# Altium PCB PwrSup.PcbDoc
Units mm, origin at the board's own origin, x right, y up, seen from the top; angles counter-clockwise.
Board outline 68.7 x 54.4 mm, 2 copper layers (Top Layer, Bottom Layer); 11 components, 47 nets, 32 pads, 0 vias.
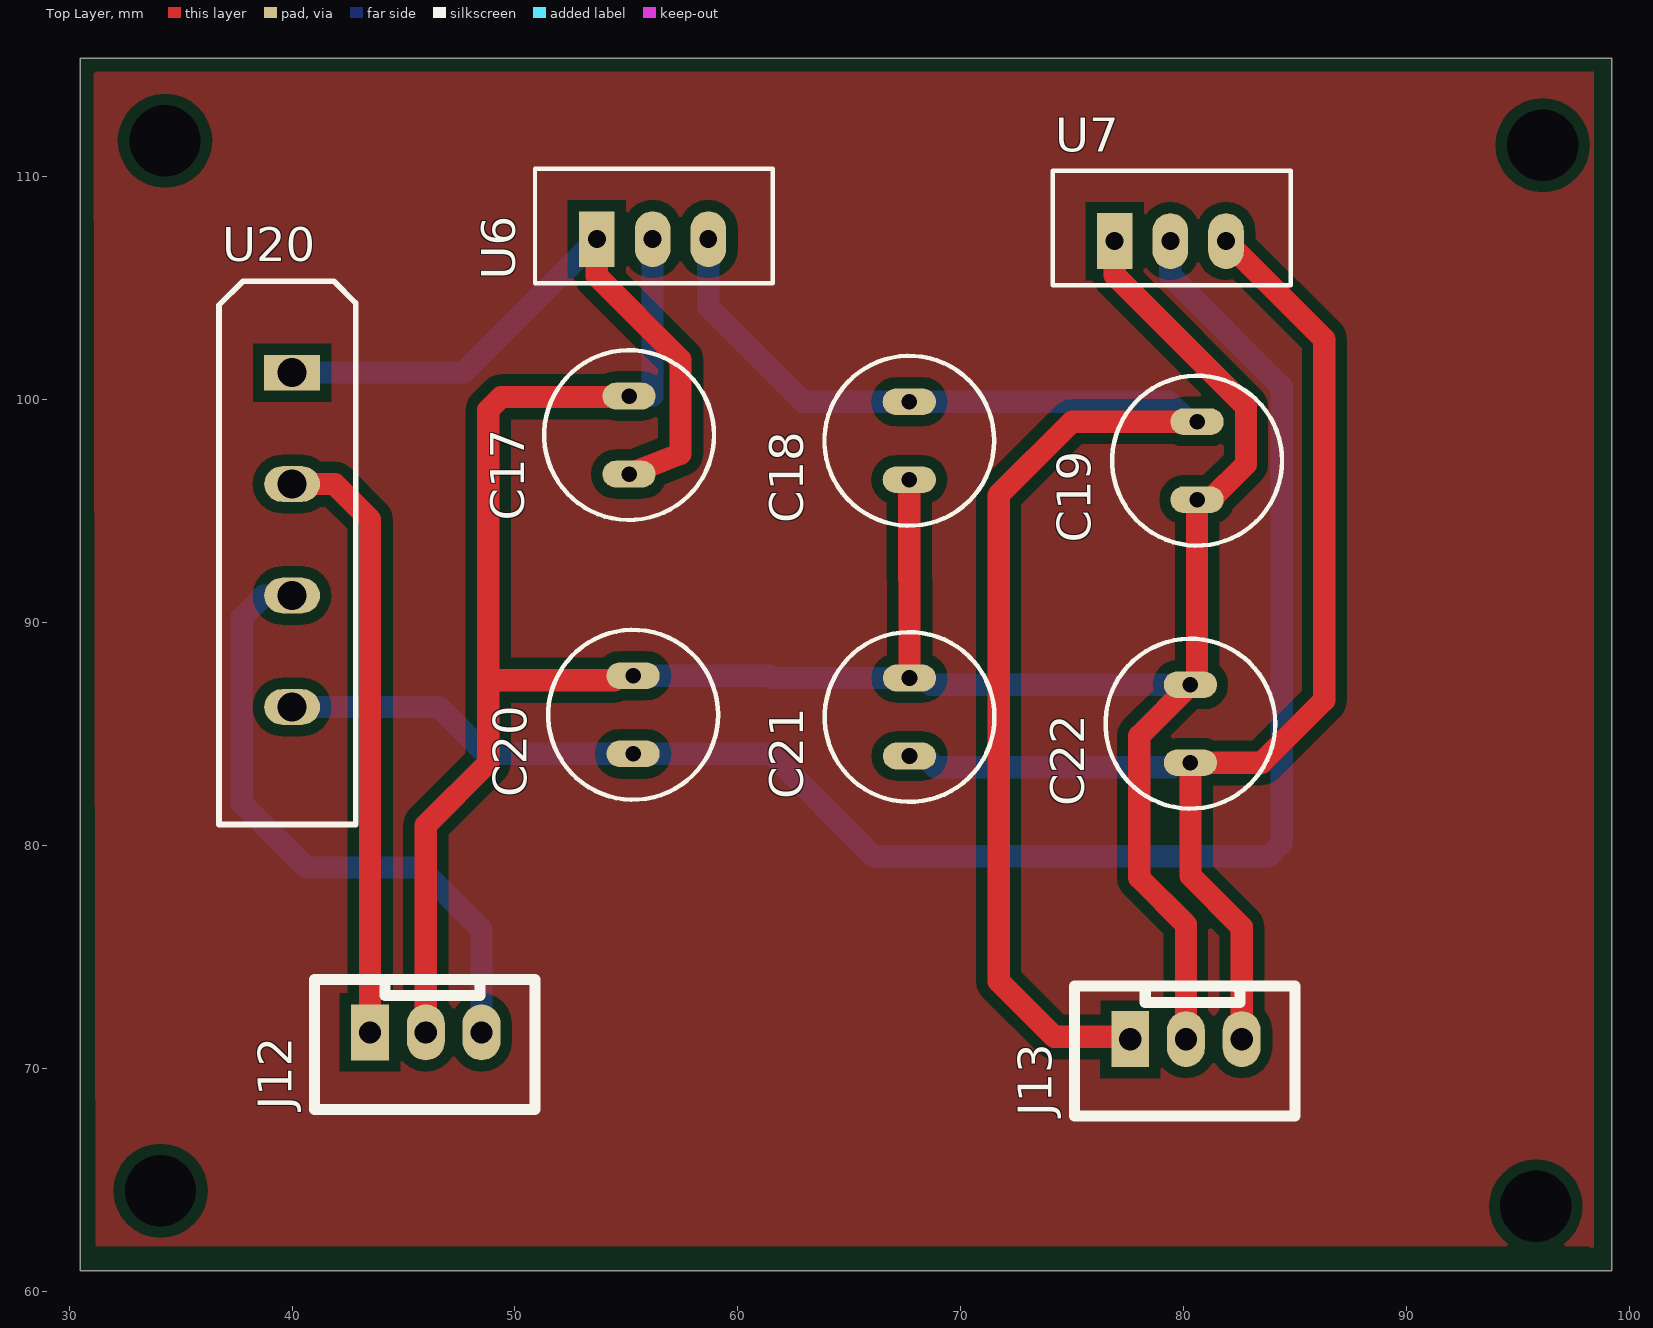
[diagram p0: Top Layer view]
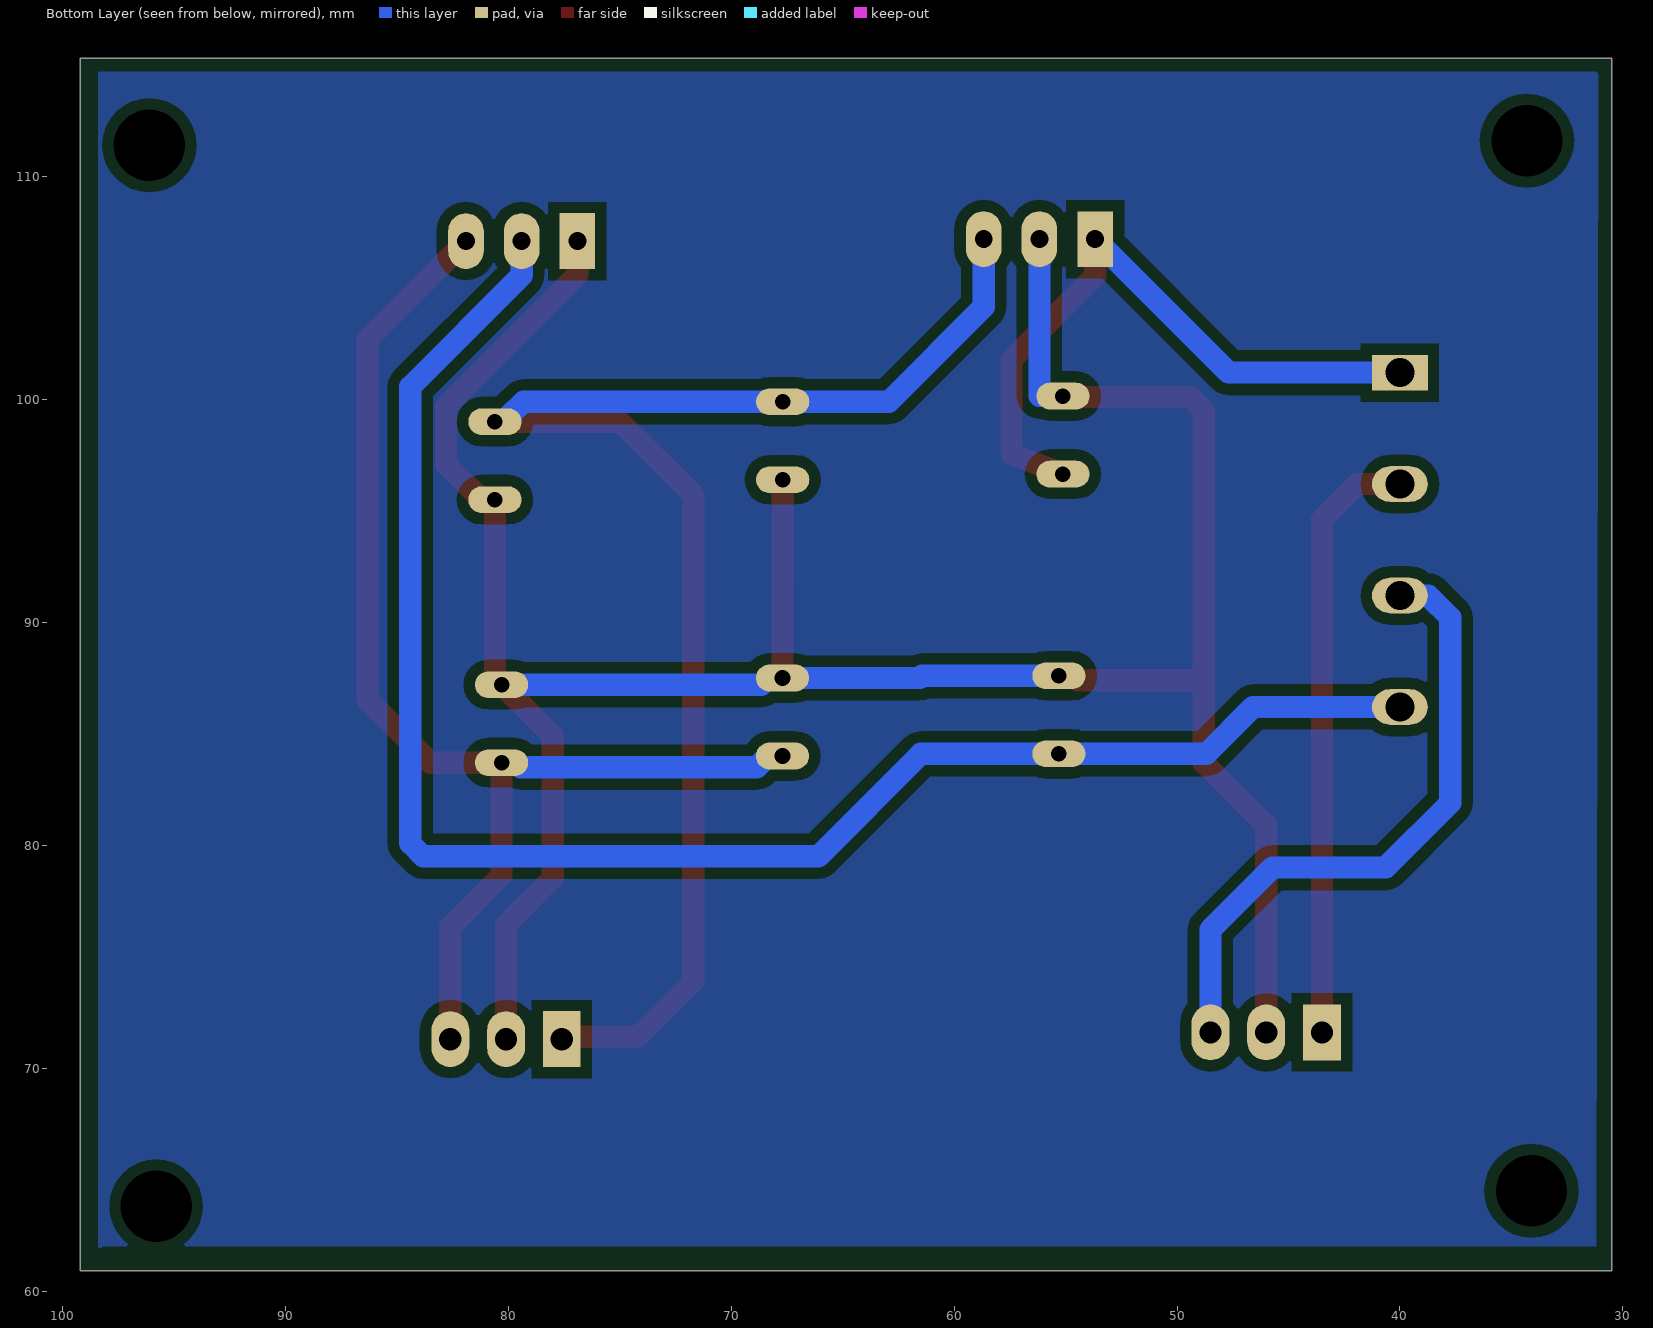
[diagram p1: Bottom Layer view, seen from below]
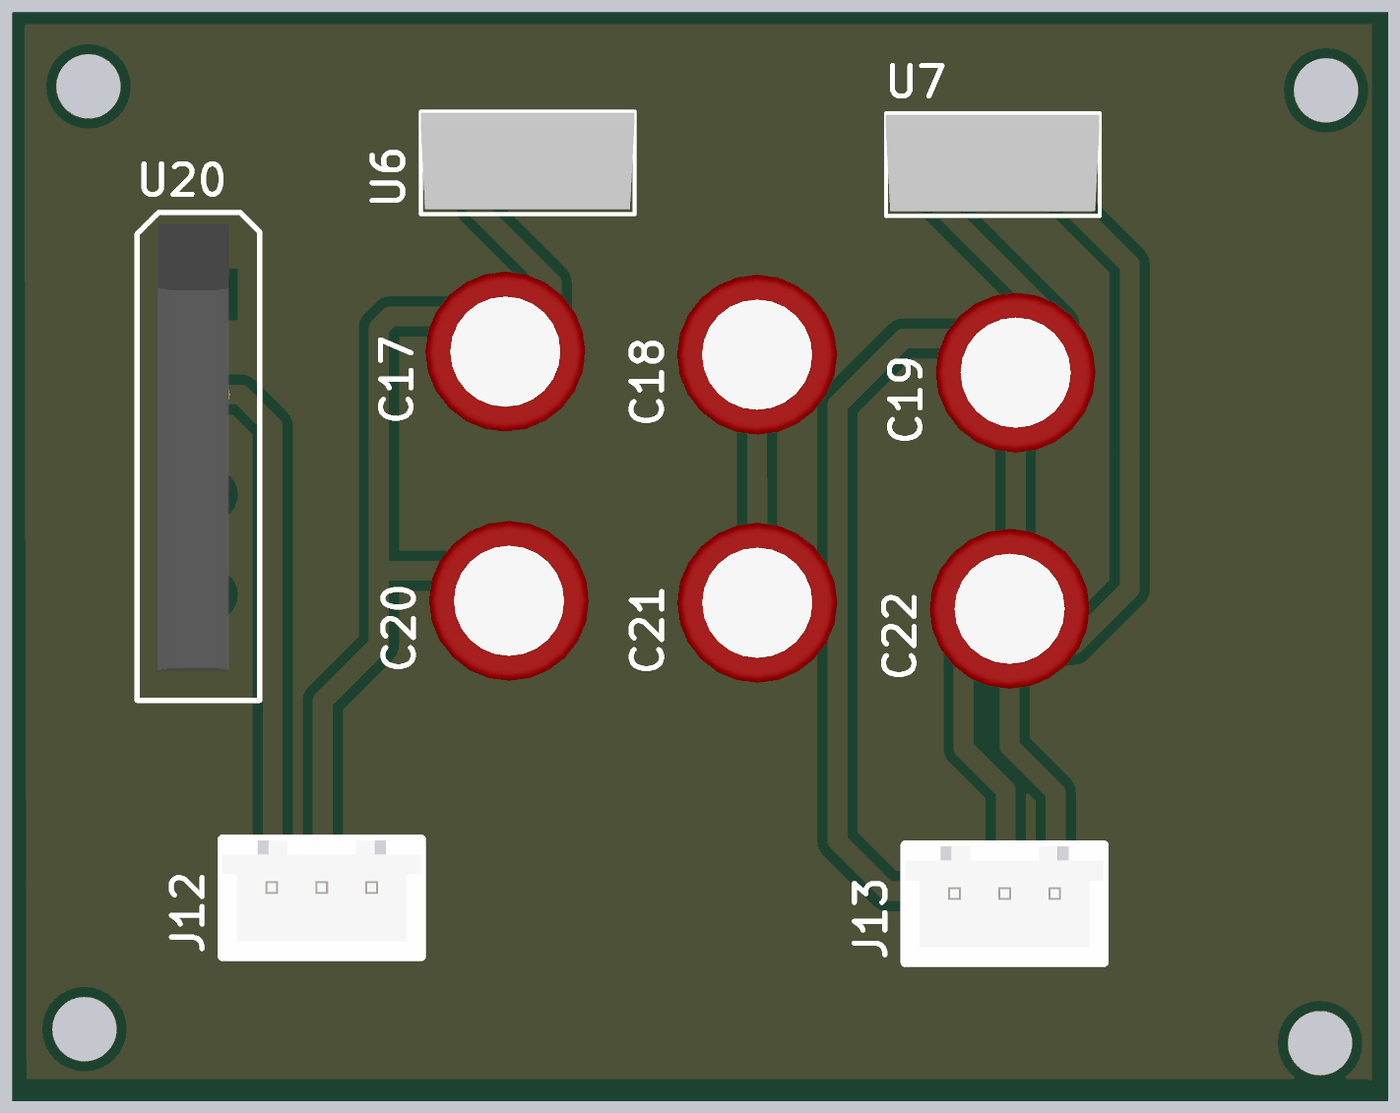
[diagram p2: 3D render of the assembled board from above, using the file's embedded part models]

## Layer stack, top to bottom
Top Solder: solder mask 0.0102, Solder Resist, Dk 3.5
Top Layer: signal copper 0.0356
Dielectric 1: dielectric 0.32, FR-4, Dk 4.8
Bottom Layer: signal copper 0.0356
Bottom Solder: solder mask 0.0102, Solder Resist, Dk 3.5

## Board outline
30.5,60.9 30.5,115.3 99.2,115.3 99.2,60.9

## Design rules (kind name [scope] priority, off if disabled: settings)
Clearance [All] p1: gap=0.5 ignorepadtopadclearanceinfootprint=FALSE
PolygonConnect [All] p1: connectstyle=Relief reliefconductorwidth=0.254 reliefentries=4 polygonreliefangle="90 Angle" airgapwidth=0.254
RoutingVias [All] p1: holewidth=0.711 width=1.27 viastyle="Through Hole" minholewidth=0.711 minwidth=1.27 maxholewidth=0.711 maxwidth=1.27
SolderMaskExpansion [All] p1: expansion=0.102 istentingtop=FALSE
Width Width_1 [All] p1: maxlimit=1 minlimit=1 preferedwidth=1
Width [All] p2: maxlimit=1 minlimit=1 preferedwidth=1
30 further rules are at their usual default settings.

## Components (designator, comment, footprint, x,y, rotation, side; value= is the part's Value field where it differs from the comment)
C17 "Cap_NP" "CAP NP" 55.118,100.147 r270 top value=2200uF
C18 "Cap_NP" "CAP NP" 67.691,96.393 r90 top value=100nF
C19 "Cap_NP" "CAP NP" 80.6,95.5 r90 top value=10uF
C20 "Cap_NP" "CAP NP" 55.3,84.1 r90 top value=2200uF
C21 "Cap_NP" "CAP NP" 67.7,84 r90 top value=10uF
C22 "Cap_NP" "CAP NP" 80.3,83.7 r90 top value=100nF
J12 "Jst" JST_3P 43.5,71.6 r90 top
J13 "Jst" JST_3P 77.6,71.3 r90 top
U6 "LM7812" "TIP 31" 53.674,107.188 r90 top
U7 "LM7912" "TIP 31" 76.9,107.1 r90 top
U20 "Diode_Bridge" "Diode Bridge 2" 40,101.2 r0 top

## Footprints (in the part's own frame and the unit in brackets; to place one, negate y for a bottom-side part, rotate by r counter-clockwise, add the part's x,y. Pads: shape width x height; smd on the part's side, far side on the other; paste and mask are expansions set on the pad)
"CAP NP" [mm]
  oval 1.2x2.388 hole 0.7: 1(0,0) 2(3.5,0)
  silkscreen extent -2.06,-3.81 5.56,3.81, body extent -2.2,-4 5.8,4, height 12
"Diode Bridge 2" [mm]
  rect 2.5x1.6 hole 1.3: 1(0,0)
  oval 2.5x1.6 hole 1.3: 2(0,-5) 3(0,-10) 4(0,-15)
  silkscreen extent -3.27,-20.27 2.85,4.1, body extent -2.25,-18.8 1.31,3.5, height 20.84
JST_3P [mm]
  rect 2.5x1.7 hole 1: 1(0,0)
  oval 2.5x1.7 hole 1: 2(0,-2.5) 3(0,-5)
  silkscreen extent -3.45,-7.4 2.38,2.5, body extent -3.42,-7.4 2.33,2.5, height 7.01
"TIP 31" [mm]
  rect 2.5x1.6 / inner rect 2.5x16 / far side rect 2.5x1.6 hole 0.8: 1(0,0)
  oval 2.5x1.6 / inner oval 2.5x16 / far side oval 2.5x1.6 hole 0.8: 2(0,-2.5) 3(0,-5)
  silkscreen extent -1.98,-7.9 3.15,2.77, body extent -1.73,-7.88 3.1,2.78, height 22.62

## Part data
J12 J13: library part Jst_3p

## Free pads (board coordinates)
  round 1.524 hole 3.2: 14(34.3,111.6) 15(34.1,64.5) 16(95.8,63.8) 17(96.1,111.4)

## Nets (pads, with @x,y where several pads share a name; then routed paths per layer and width w, separated by ;. In a path a pad name is that pad's centre, name@x,y a point inside that pad or via, vN(x,y) a via of type N, cw(c..) or ccw(c..) an arc to the next point about the centre after c; other vN are vias at no path point)
1IN+: 
1IN-: 
2IN+: C17.1 C18.1 C19.1 C20.2 C21.2 C22.2 J12.2 J13.2 U6.2 U7.1 | length 126
  Top Layer w1: J12.2 46,80.896 48.8,83.696 48.8,87.4 ; C17.1 55.08,100.109 49.386,100.109 48.8,99.523 48.8,87.4 ; C20.2 54.652,87.6 54.452,87.4 48.8,87.4 ; C18.1 67.691,91.932 67.7,91.923 C21.2 ; U7.1 76.9,105.574 82.794,99.68 82.794,97.09 81.204,95.5 C19.1 80.6,87.2 C22.2 78.003,84.903 78.003,78.537 80.1,76.44 J13.2
  Bottom Layer w1: C17.1 56.174,100.147 U6.2 ; C20.2 61.443,87.6 61.543,87.5 68.348,87.5 68.648,87.2 C22.2
2IN-: 
4IN+: 
5IN-: 
6IN-: 
7IN-: 
AOUT1: 
AOUT2: 
AOUT4: 
AOUT5: 
AOUT6: 
AOUT7: 
NetC1_1: 
NetC1_2: 
NetC2_1: 
NetC3_1: 
NetC4_1: 
NetC5_1: 
NetC6_1: 
NetC9_2: 
NetC10_1: 
NetC11_2: 
NetC12_2: 
NetC13_2: 
NetC14_2: 
NetC15_2: 
NetC16_2: 
NetC17_2: C17.2 U6.1 U20.1 | length 29.8
  Top Layer w1: U6.1 53.674,105.533 57.429,101.778 57.429,97.561 C17.2
  Bottom Layer w1: U20.1 47.686,101.2 U6.1
NetC20_1: C20.1 U7.2 U20.4 | length 76.5
  Bottom Layer w1: U20.4 46.584,86.2 48.684,84.1 C20.1 61.493,84.1 66.093,79.5 83.814,79.5 84.4,80.086 84.4,100.563 79.4,105.563 U7.2
NetJ12_1: J12.1 U20.2 | length 27.2
  Top Layer w1: U20.2 41.91,96.2 43.5,94.61 J12.1
NetJ12_3: J12.3 U20.3 | length 28.7
  Bottom Layer w1: U20.3 38.735,91.2 37.744,90.209 37.744,81.89 40.64,78.994 45.72,78.994 48.5,76.214 J12.3
NetR1_2: 
NetR10_1: 
NetU1_1: 
OUTC1: 
POTOF: 
"PWM in": 
"Signal Out": 
"Sine in": 
SO1X: 
SO10X: 
SOUT: 
Vcc+: C18.2 C19.2 J13.1 U6.3 | length 66.2
  Top Layer w1: J13.1 77.35,71.3 77.25,71.4 74.2,71.4 71.7,73.9 71.7,95.7 75,99 C19.2
  Bottom Layer w1: U6.3 58.674,104.14 62.921,99.893 C18.2 79.32,99.893 79.968,99.245 79.968,99.092 80.06,99 C19.2
Vcc-: C21.1 C22.1 J13.3 U7.3 | length 56
  Top Layer w1: U7.3 81.9,106.812 82.177,106.535 82.465,106.535 86.3,102.7 86.3,86.5 83.5,83.7 C22.1 80.3,78.627 82.6,76.327 J13.3
  Bottom Layer w1: C21.1 68.348,84 68.848,83.5 79.452,83.5 79.652,83.7 C22.1
VREF: 

## Polygon pours and split planes (outlines as drawn)
no net on Bottom Layer "NONET_L02_P000" (solid, pour order 0): 31.1,114.6 31.2,114.7 98.4,114.7 98.4,61.8 98.2,62 31.2,62
no net on Top Layer "NONET_L01_P002" (solid, pour order 2): 31.1,114.6 31.2,114.7 98.4,114.7 98.4,61.8 98.2,62 31.2,62

## Silkscreen, mask and mechanical layers (free items; w line width, h text height)
Mechanical 3:
  the board outline again, w1